# EAGLE board example_practice (EAGLE 9.7.0)

Size 83.43 x 108.2 mm. Coordinates in mm from the lower left corner, seen from the top.
Outline: 0,0 83.42,0 83.42,108.19 0,108.19 0,0
Copper layers (1*16): Top 0.035mm / dielectric 1.5mm / Bottom 0.035mm
Design rules "default": minimum track width 6mil, minimum drill 0.35mm, track to track 6mil, track to pad 6mil, pad to pad 6mil, via to via 6mil, smd to smd 6mil, copper to edge 40mil, drill to drill 6mil, minimum pad ring 10mil, minimum via ring 8mil, stop-mask expansion 4mil, vias tented up to drill 0mil, thermal gap 10mil

## Footprints (pad centres in the part's own frame; a part is rotated, then mirrored left to right if it is on the bottom)
LEDRD254W60D565H860B = drill 0.981 pad 1.581: 1 -1.27,0; 2 1.27,0
LEDRD254W60D565H860B_Y = drill 0.981 pad 1.581: 1 -1.27,0; 2 1.27,0
LEDRD254W60D565H860B_G = drill 0.981 pad 1.581: 1 -1.27,0; 2 1.27,0
PIEZO = drill 1 pad 1.6: 1 -3.5,0; 2 3.5,0
RESAD1016W63L850D250B = drill 0.83 pad 1.43: 1 -5.08,0; 2 5.08,0
1X02 = drill 1.016 long: 1 -1.27,0; 2 1.27,0
ARDUINO-UNO-R3-SHIELD = drill 1.016 pad 1.88: 3.3V 24.13,-2.54; 5V 24.13,0; A0 24.13,12.7; A1 24.13,15.24; A2 24.13,17.78; A3 24.13,20.32; A4 24.13,22.86; A5 24.13,25.4; AREF -24.13,-13.97; D2 -24.13,20.32; D3 -24.13,17.78; D4 -24.13,15.24; D5 -24.13,12.7; D6 -24.13,10.16; D7 -24.13,7.62; D8 -24.13,3.81; D9 -24.13,1.27; D10 -24.13,-1.27; D11 -24.13,-3.81; D12 -24.13,-6.35; D13 -24.13,-8.89; GND@0 24.13,2.54; GND@1 24.13,5.08; GND@2 -24.13,-11.43; IOREF 24.13,-7.62; NC 24.13,-10.16; RES 24.13,-5.08; RX -24.13,25.4; SCL -24.13,-19.05; SDA -24.13,-16.51; TX -24.13,22.86; VIN 24.13,7.62

## Placement (x,y rotation side)
D5  RED  [LEDRD254W60D565H860B]  32.65,81.92 180 top
D6  YELLOW  [LEDRD254W60D565H860B_Y]  37.73,81.92 180 top
D7  GREEN  [LEDRD254W60D565H860B_G]  42.8,81.92 180 top
PIEZO2  PIEZO  [PIEZO]  42.8,94.61 0 top
R11  220  [RESAD1016W63L850D250B]  31.38,69.22 90 top
R12  FORCE-SENSOR  [1X02]  75.83,81.92 0 top
R13  220  [RESAD1016W63L850D250B]  36.45,69.22 90 top
R14  220  [RESAD1016W63L850D250B]  41.53,69.22 90 top
R15  10k  [RESAD1016W63L850D250B]  77.09,69.22 90 top
U3  ARDUINO-UNO-R3-SHIELD  [ARDUINO-UNO-R3-SHIELD]  47.88,29.84 270 top

## Library data of the parts
D5 = Tinkercad; CATEGORY: Opto-Electronic; SUB-CATEGORY: LED; VALUE: LED_RED
D6 = Tinkercad; CATEGORY: Opto-Electronic; SUB-CATEGORY: LED; VALUE: LED_YELLOW
D7 = Tinkercad; CATEGORY: Opto-Electronic; SUB-CATEGORY: LED; VALUE: LED_GREEN
PIEZO2 R11-R15 U3 = Tinkercad

## Nets
D5_C: D5.2 R11.2
D6_C: D6.2 R13.2
D7_C: D7.2 R14.2
U3_5V: R12.1 U3.5V
U3_A5: R12.2 R15.2 U3.A5
U3_D9: PIEZO2.2 U3.D9
U3_D10: D7.1 U3.D10
U3_D11: D6.1 U3.D11
U3_D12: D5.1 U3.D12
U3_GND: PIEZO2.1 R11.1 R13.1 R14.1 R15.1 U3.GND@0 U3.GND@1 U3.GND@2

## Tracks (layer width: path | path; a pad name or v marks a point on that pad's centre or on a via)
D5_C  (1 unrouted)
D6_C  (1 unrouted)
D7_C  (1 unrouted)
U3_5V  (1 unrouted)
U3_A5  (2 unrouted)
U3_D9  (1 unrouted)
U3_D10  (1 unrouted)
U3_D11  (1 unrouted)
U3_D12  (1 unrouted)
U3_GND  (7 unrouted)